# EAGLE board LightRetaggioSchema (EAGLE 9.6.2)
DATECODE: 20200423
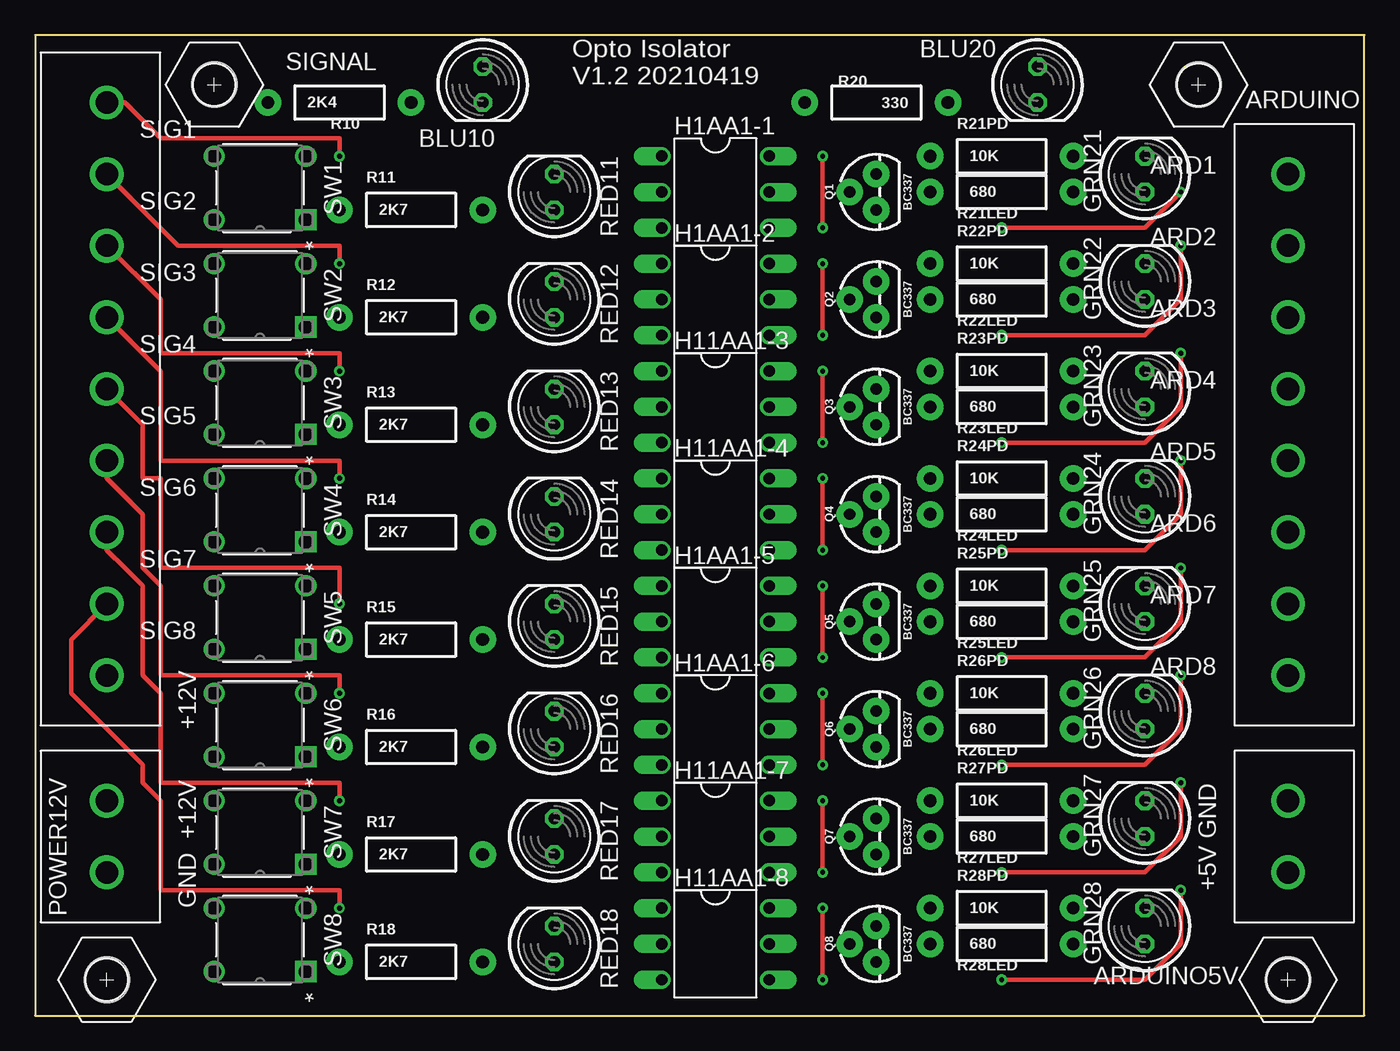
[diagram p0: board, top side]
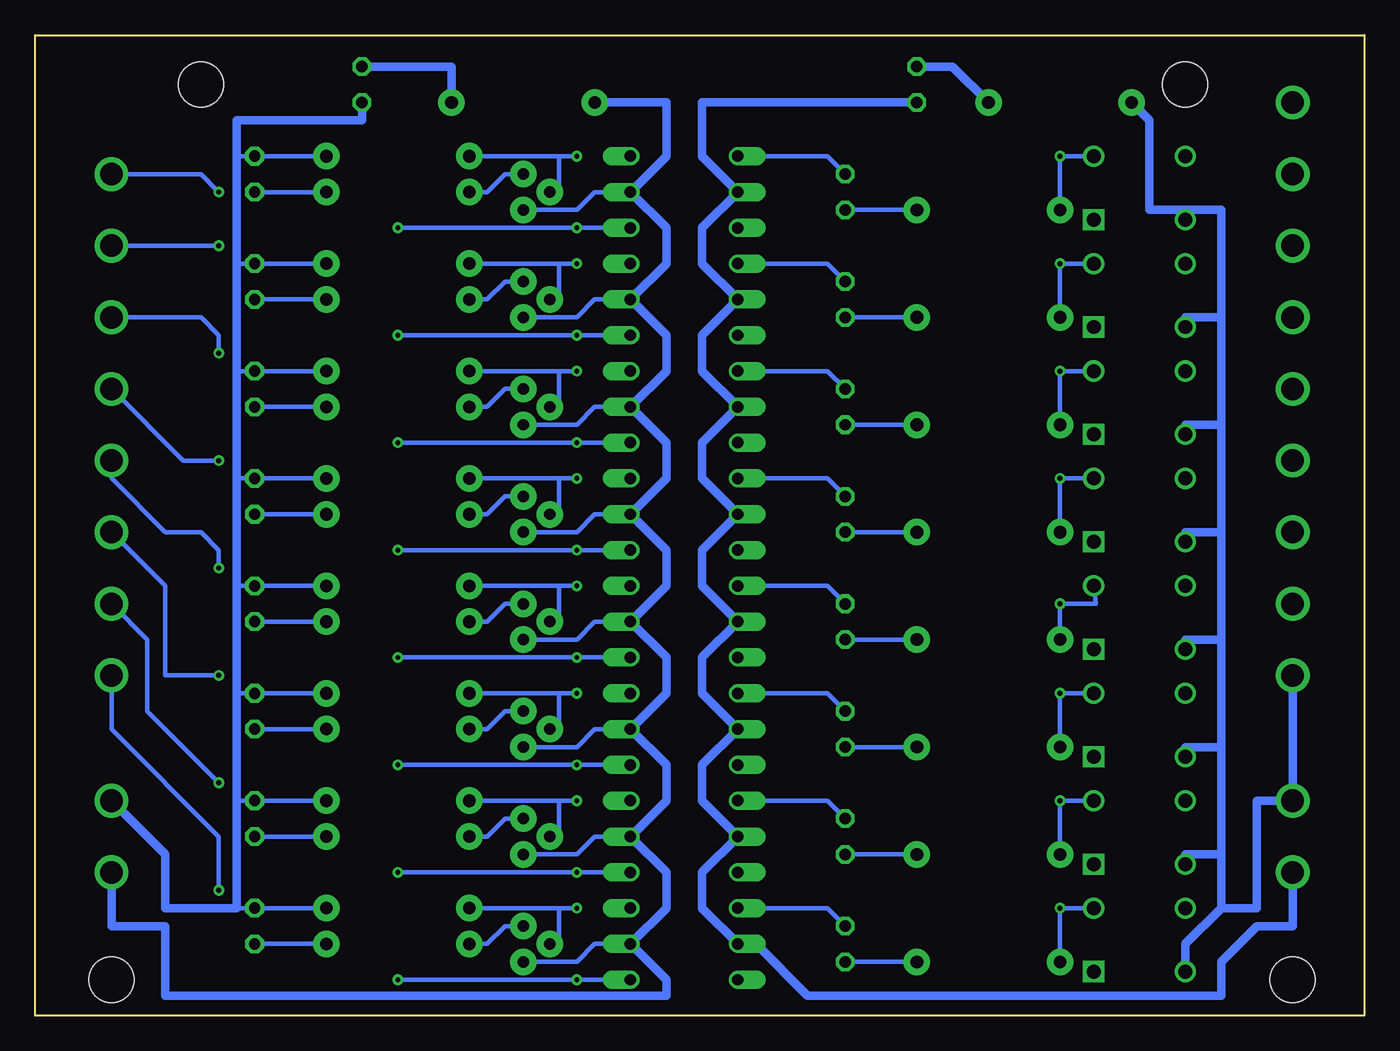
[diagram p1: board, bottom side, seen from below]

Size 94.31 x 69.54 mm. Coordinates in mm from the lower left corner, seen from the top.
Outline: 0,0 94.31,0 94.31,69.54 0,69.54 0,0
Copper layers (1*16): Top 0.035mm / dielectric 1.5mm / Bottom 0.035mm
Design rules "default": minimum track width 6mil, minimum drill 0.35mm, track to track 6mil, track to pad 6mil, pad to pad 6mil, via to via 6mil, smd to smd 6mil, copper to edge 40mil, drill to drill 6mil, minimum pad ring 10mil, minimum via ring 8mil, stop-mask expansion 4mil, vias tented up to drill 0mil, thermal gap 10mil
Net classes: 0 default: width 0.305 mm, clearance 0.152 mm; 1 ground: width 0.61 mm, clearance 0.305 mm; 2 power: width 0.61 mm, clearance 0.305 mm
Holes 3.2 mm at 12.7,66.04 5.08,2.54 88.9,2.54 82.55,66.04

## Footprints (pad centres in the part's own frame; a part is rotated, then mirrored left to right if it is on the bottom)
691311500108 = drill 1.6: 1 -17.78,0; 2 -12.7,0; 3 -7.62,0; 4 -2.54,0; 5 2.54,0; 6 7.62,0; 7 12.7,0; 8 17.78,0
691311500102 = drill 1.6: 1 -2.54,0; 2 2.54,0
LED5MM = drill 0.813 octagon: A -1.27,0; K 1.27,0
DIL06 = drill 0.813 offset: 1 -2.54,-3.81; 2 0,-3.81; 3 2.54,-3.81; 4 2.54,3.81; 5 0,3.81; 6 -2.54,3.81
TO-92 = drill 0.813 pad 1.88: 1 -1.27,0; 2 0,1.905; 3 1.27,0
AXIAL-0.4 = drill 0.9 pad 1.88: P$1 -5.08,0; P$2 5.08,0
691311500109 = drill 1.6: 1 -20.32,0; 2 -15.24,0; 3 -10.16,0; 4 -5.08,0; 5 0,0; 6 5.08,0; 7 10.16,0; 8 15.24,0; 9 20.32,0
SW4_1825910-D = drill 0.991 pad 1.499 square: 1 -6.502,4.496 | drill 0.991 pad 1.499: 2 0,4.496; 3 -6.502,0; 4 0,0

## Placement (x,y rotation side)
ARDUINO  [691311500108]  88.9,41.91 90 top
ARDUINO5V  [691311500102]  88.9,12.7 90 top
BLU10  [LED5MM]  31.75,66.04 270 top
BLU20  [LED5MM]  71.12,66.04 270 top
GRN21  [LED5MM]  78.74,59.69 90 top
GRN22  [LED5MM]  78.74,52.07 90 top
GRN23  [LED5MM]  78.74,44.45 90 top
GRN24  [LED5MM]  78.74,36.83 90 top
GRN25  [LED5MM]  78.74,29.21 90 top
GRN26  [LED5MM]  78.74,21.59 90 top
GRN27  [LED5MM]  78.74,13.97 90 top
GRN28  [LED5MM]  78.74,6.35 90 top
H1AA1-1  IL250  [DIL06]  48.26,58.42 270 top
H1AA1-2  IL250  [DIL06]  48.26,50.8 270 top
H1AA1-5  IL250  [DIL06]  48.26,27.94 270 top
H1AA1-6  IL250  [DIL06]  48.26,20.32 270 top
H11AA1-3  IL250  [DIL06]  48.26,43.18 270 top
H11AA1-4  IL250  [DIL06]  48.26,35.56 270 top
H11AA1-7  IL250  [DIL06]  48.26,12.7 270 top
H11AA1-8  IL250  [DIL06]  48.26,5.08 270 top
POWER12V  [691311500102]  5.08,12.7 270 top
Q1  BC337  [TO-92]  59.69,58.42 90 top
Q2  BC337  [TO-92]  59.69,50.8 90 top
Q3  BC337  [TO-92]  59.69,43.18 90 top
Q4  BC337  [TO-92]  59.69,35.56 90 top
Q5  BC337  [TO-92]  59.69,27.94 90 top
Q6  BC337  [TO-92]  59.69,20.32 90 top
Q7  BC337  [TO-92]  59.69,12.7 90 top
Q8  BC337  [TO-92]  59.69,5.08 90 top
R10  2K4  [AXIAL-0.4]  21.59,64.77 0 top
R11  2K7  [AXIAL-0.4]  26.67,57.15 0 top
R12  2K7  [AXIAL-0.4]  26.67,49.53 0 top
R13  2K7  [AXIAL-0.4]  26.67,41.91 0 top
R14  2K7  [AXIAL-0.4]  26.67,34.29 0 top
R15  2K7  [AXIAL-0.4]  26.67,26.67 0 top
R16  2K7  [AXIAL-0.4]  26.67,19.05 0 top
R17  2K7  [AXIAL-0.4]  26.67,11.43 0 top
R18  2K7  [AXIAL-0.4]  26.67,3.81 0 top
R20  330  [AXIAL-0.4]  59.69,64.77 180 top
R21LED  680  [AXIAL-0.4]  68.58,58.42 0 top
R21PD  10K  [AXIAL-0.4]  68.58,60.96 0 top
R22LED  680  [AXIAL-0.4]  68.58,50.8 0 top
R22PD  10K  [AXIAL-0.4]  68.58,53.34 0 top
R23LED  680  [AXIAL-0.4]  68.58,43.18 0 top
R23PD  10K  [AXIAL-0.4]  68.58,45.72 0 top
R24LED  680  [AXIAL-0.4]  68.58,35.56 0 top
R24PD  10K  [AXIAL-0.4]  68.58,38.1 0 top
R25LED  680  [AXIAL-0.4]  68.58,27.94 0 top
R25PD  10K  [AXIAL-0.4]  68.58,30.48 0 top
R26LED  680  [AXIAL-0.4]  68.58,20.32 0 top
R26PD  10K  [AXIAL-0.4]  68.58,22.86 0 top
R27LED  680  [AXIAL-0.4]  68.58,12.7 0 top
R27PD  10K  [AXIAL-0.4]  68.58,15.24 0 top
R28LED  680  [AXIAL-0.4]  68.58,5.08 0 top
R28PD  10K  [AXIAL-0.4]  68.58,7.62 0 top
RED11  [LED5MM]  36.83,58.42 90 top
RED12  [LED5MM]  36.83,50.8 90 top
RED13  [LED5MM]  36.83,43.18 90 top
RED14  [LED5MM]  36.83,35.56 90 top
RED15  [LED5MM]  36.83,27.94 90 top
RED16  [LED5MM]  36.83,20.32 90 top
RED17  [LED5MM]  36.83,12.7 90 top
RED18  [LED5MM]  36.83,5.08 90 top
SIGNAL  [691311500109]  5.08,44.45 270 top
SW1  1-1825910-4  [SW4_1825910-D]  12.7,60.96 180 top
SW2  1-1825910-4  [SW4_1825910-D]  12.7,53.34 180 top
SW3  1-1825910-4  [SW4_1825910-D]  12.7,45.72 180 top
SW4  1-1825910-4  [SW4_1825910-D]  12.7,38.1 180 top
SW5  1-1825910-4  [SW4_1825910-D]  12.7,30.48 180 top
SW6  1-1825910-4  [SW4_1825910-D]  12.7,22.86 180 top
SW7  1-1825910-4  [SW4_1825910-D]  12.7,15.24 180 top
SW8  1-1825910-4  [SW4_1825910-D]  12.7,7.62 180 top
U$1  [M3.0_SW6.0]  82.55,66.04 0 top
U$2  [M3.0_SW6.0]  5.08,2.54 0 top
U$3  [M3.0_SW6.0]  12.7,66.04 0 top
U$5  [M3.0_SW6.0]  88.9,2.54 0 top

## Library data of the parts
ARDUINO SIGNAL = Wurth_Elektronik_Electromechanic_Terminal_Blocks_Connectors_rev19d; OC_FARNELL: unknown
ARDUINO5V POWER12V = Wurth_Elektronik_Electromechanic_Terminal_Blocks_Connectors_rev19d; MF: WURTH ELEKTRONIK; MPN: 691311500102; OC_FARNELL: 1641978
BLU10 BLU20 GRN21-GRN28 RED11-RED18 = led; MF: ALCOSWITCH - TE CONNECTIVITY; MPN: FSM8JH; OC_FARNELL: 1555985
H1AA1-1 H1AA1-2 H1AA1-5 H1AA1-6 H11AA1-3 H11AA1-4 H11AA1-7 H11AA1-8 = optocoupler; MF: VISHAY/TELEFUNKEN; MPN: IL250; OC_FARNELL: unknown; OC_NEWARK: 58K1705
Q1-Q8 = SparkFun-DiscreteSemi; OC_FARNELL: unknown; PROD_ID: TRANS-09536
R10-R18 R20 R21LED R21PD R22LED R22PD R23LED R23PD R24LED R24PD R25LED R25PD R26LED R26PD R27LED R27PD R28LED R28PD = SparkFun-Passives; OC_FARNELL: unknown
SW1-SW8 = Switches; BUILT_BY: EMA_UL_Team; CATEGORY: Tactile Switches; CONFIGURATION__POLE-THROW_: Single Pole - Single Throw; COPYRIGHT: Copyright (C) 2016 Accelerated Designs. All rights reserved; DESCRIPTION: FSM8JH=6MM TACT SWITCH, HIGH TEMP; MANUFACTURER_PART_NUMBER: 1-1825910-4; MAX_SWITCHING_CURRENT: -; MAX_SWITCHING_VOLTAGE_AC_: -; OC_FARNELL: unknown; PART_STATUS: active; PRODUCT_TYPE: Switch; SERIES: Unknown; SWITCH_TYPE: Tactile Switches; TE_PART_NUMBER: 1-1825910-4; VENDOR: TE Connectivity
U$1-U$3 U$5 = mechanics_v4

## Nets
+5VARD: ARDUINO5V.1 H1AA1-1.5 H1AA1-2.5 H1AA1-5.5 H1AA1-6.5 H11AA1-3.5 H11AA1-4.5 H11AA1-7.5 H11AA1-8.5 Q1.1 Q2.1 Q3.1 Q4.1 Q5.1 Q6.1 Q7.1 Q8.1 R20.P$2
DIG1: ARDUINO.8 H1AA1-1.4 Q1.2 R21PD.P$1
DIG2: ARDUINO.7 H1AA1-2.4 Q2.2 R22PD.P$1
DIG3: ARDUINO.6 H11AA1-3.4 Q3.2 R23PD.P$1
DIG4: ARDUINO.5 H11AA1-4.4 Q4.2 R24PD.P$1
DIG5: ARDUINO.4 H1AA1-5.4 Q5.2 R25PD.P$1
DIG6: ARDUINO.3 H1AA1-6.4 Q6.2 R26PD.P$1
DIG7: ARDUINO.2 H11AA1-7.4 Q7.2 R27PD.P$1
DIG8: ARDUINO.1 H11AA1-8.4 Q8.2 R28PD.P$1
GND_ARD: ARDUINO5V.2 BLU20.K GRN21.K GRN22.K GRN23.K GRN24.K GRN25.K GRN26.K GRN27.K GRN28.K R21PD.P$2 R22PD.P$2 R23PD.P$2 R24PD.P$2 R25PD.P$2 R26PD.P$2 R27PD.P$2 R28PD.P$2
GND_SIG [ground]: BLU10.K H1AA1-1.2 H1AA1-2.2 H1AA1-5.2 H1AA1-6.2 H11AA1-3.2 H11AA1-4.2 H11AA1-7.2 H11AA1-8.2 POWER12V.2
N$1: BLU10.A R10.P$2
N$2: BLU20.A R20.P$1
N$3: H11AA1-8.1 RED18.K
N$4: H11AA1-7.1 RED17.K
N$5: H1AA1-6.1 RED16.K
N$6: H1AA1-5.1 RED15.K
N$7: Q1.3 R21LED.P$1
N$8: GRN21.A R21LED.P$2
N$9: H11AA1-4.1 RED14.K
N$10: Q2.3 R22LED.P$1
N$11: GRN22.A R22LED.P$2
N$12: Q3.3 R23LED.P$1
N$13: GRN23.A R23LED.P$2
N$14: Q4.3 R24LED.P$1
N$15: GRN24.A R24LED.P$2
N$16: R13.P$2 RED13.A
N$17: H11AA1-3.1 RED13.K
N$18: R14.P$2 RED14.A
N$19: R12.P$2 RED12.A
N$20: R11.P$2 RED11.A
N$21: R17.P$2 RED17.A
N$22: R18.P$2 RED18.A
N$23: R16.P$2 RED16.A
N$24: R15.P$2 RED15.A
N$25: Q5.3 R25LED.P$1
N$26: GRN25.A R25LED.P$2
N$27: Q6.3 R26LED.P$1
N$28: GRN26.A R26LED.P$2
N$29: Q7.3 R27LED.P$1
N$30: GRN27.A R27LED.P$2
N$31: Q8.3 R28LED.P$1
N$32: GRN28.A R28LED.P$2
N$33: H1AA1-2.1 RED12.K
N$34: H1AA1-1.1 RED11.K
RET+12_SIG1: R11.P$1 SIGNAL.1 SW1.3
RET+12_SIG2: R12.P$1 SIGNAL.2 SW2.3
RET+12_SIG3: R13.P$1 SIGNAL.3 SW3.3
RET+12_SIG4: R14.P$1 SIGNAL.4 SW4.3
RET+12_SIG5: R15.P$1 SIGNAL.5 SW5.3
RET+12_SIG6: R16.P$1 SIGNAL.6 SW6.3
RET+12_SIG7: R17.P$1 SIGNAL.7 SW7.3
RET+12_SIG8: R18.P$1 SIGNAL.8 SW8.3
VCC+12_SIGBYPASS [power]: POWER12V.1 R10.P$1 SIGNAL.9 SW1.2 SW2.2 SW3.2 SW4.2 SW5.2 SW6.2 SW7.2 SW8.2

## Tracks (layer width: path | path; a pad name or v marks a point on that pad's centre or on a via)
+5VARD
  Bottom 0.305: Q1.1 55.88,57.15 54.61,58.42 H1AA1-1.5 | H1AA1-2.5 54.61,50.8 55.88,49.53 Q2.1 | H11AA1-3.5 54.61,43.18 55.88,41.91 Q3.1 | H11AA1-4.5 54.61,35.56 55.88,34.29 Q4.1 | H1AA1-5.5 54.61,27.94 55.88,26.67 Q5.1 | H1AA1-6.5 54.61,20.32 55.88,19.05 Q6.1 | H11AA1-7.5 54.61,12.7 55.88,11.43 Q7.1 | H11AA1-8.5 54.61,5.08 55.88,3.81 Q8.1
  Bottom 0.61: R20.P$2 49.53,64.77 49.53,60.96 H1AA1-1.5 49.53,55.88 49.53,53.34 H1AA1-2.5 49.53,48.26 49.53,45.72 H11AA1-3.5 49.53,40.64 49.53,38.1 H11AA1-4.5 49.53,33.02 49.53,30.48 H1AA1-5.5 49.53,25.4 49.53,22.86 H1AA1-6.5 49.53,17.78 49.53,15.24 H11AA1-7.5 49.53,10.16 49.53,7.62 H11AA1-8.5 49.53,2.54 49.53,1.4 85.09,1.4 85.09,6.35 88.9,6.35 ARDUINO5V.1
DIG1  (via drill 0.35)
  Top 0.305: v55.88,60.96 v55.88,55.88 | v68.58,55.88 74.93,55.88 78.74,55.88 v81.28,58.42
  Bottom 0.305: v55.88,60.96 57.15,60.96 | 57.15,60.96 R21PD.P$1 | H1AA1-1.4 v55.88,55.88 v68.58,55.88 | Q1.2 57.15,58.42 57.15,60.96 | ARDUINO.8 82.55,59.69 v81.28,58.42
DIG2  (via drill 0.35)
  Top 0.305: v55.88,48.26 v55.88,53.34 | v68.58,48.26 74.93,48.26 78.74,48.26 81.28,50.8 v81.28,54.61
  Bottom 0.305: H1AA1-2.4 v55.88,48.26 v68.58,48.26 | v55.88,53.34 57.15,53.34 | 57.15,53.34 R22PD.P$1 | Q2.2 57.15,50.8 57.15,53.34 | ARDUINO.7 v81.28,54.61
DIG3  (via drill 0.35)
  Top 0.305: v68.58,40.64 76.2,40.64 78.74,40.64 81.28,43.18 v81.28,46.99 | v55.88,40.64 v55.88,45.72
  Bottom 0.305: H11AA1-3.4 v55.88,40.64 v68.58,40.64 | Q3.2 57.15,43.18 57.15,45.72 | 57.15,45.72 R23PD.P$1 | v55.88,45.72 57.15,45.72 | v81.28,46.99 81.28,48.26 82.55,49.53 ARDUINO.6
DIG4  (via drill 0.35)
  Top 0.305: v55.88,33.02 v55.88,38.1 | v68.58,33.02 76.2,33.02 78.74,33.02 81.28,35.56 v81.28,39.37
  Bottom 0.305: H11AA1-4.4 v55.88,33.02 v68.58,33.02 | v55.88,38.1 57.15,38.1 | 57.15,38.1 R24PD.P$1 | Q4.2 57.15,35.56 57.15,38.1 | ARDUINO.5 83.82,39.37 v81.28,39.37
DIG5  (via drill 0.35)
  Top 0.305: v55.88,25.4 v55.88,30.48 | v68.58,25.4 74.93,25.4 78.74,25.4 81.28,27.94 v81.28,31.75
  Bottom 0.305: H1AA1-5.4 v55.88,25.4 v68.58,25.4 | v55.88,30.48 57.15,30.48 | 57.15,30.48 R25PD.P$1 | Q5.2 57.15,27.94 57.15,30.48 | ARDUINO.4 88.9,38.1 85.09,34.29 82.55,34.29 81.28,33.02 v81.28,31.75
DIG6  (via drill 0.35)
  Top 0.305: v55.88,17.78 v55.88,22.86 | v68.58,17.78 76.2,17.78 78.74,17.78 81.28,20.32 v81.28,24.13
  Bottom 0.305: H1AA1-6.4 v55.88,17.78 v68.58,17.78 | Q6.2 57.15,20.32 57.15,22.86 | 57.15,22.86 R26PD.P$1 | v55.88,22.86 57.15,22.86 | ARDUINO.3 85.09,30.48 85.09,24.13 v81.28,24.13
DIG7  (via drill 0.35)
  Top 0.305: v55.88,10.16 v55.88,15.24 | v81.28,16.51 81.28,12.7 78.74,10.16 v68.58,10.16
  Bottom 0.305: H11AA1-7.4 v55.88,10.16 v68.58,10.16 | Q7.2 57.15,12.7 57.15,15.24 | 57.15,15.24 R27PD.P$1 | v55.88,15.24 57.15,15.24 | v81.28,16.51 86.36,21.59 86.36,26.67 ARDUINO.2
DIG8  (via drill 0.35)
  Top 0.305: v55.88,2.54 v55.88,7.62 | v68.58,2.54 78.74,2.54 81.28,5.08 v81.28,8.89
  Bottom 0.305: H11AA1-8.4 v55.88,2.54 v68.58,2.54 | Q8.2 57.15,5.08 57.15,7.62 | 57.15,7.62 R28PD.P$1 | v55.88,7.62 57.15,7.62 | ARDUINO.1 88.9,20.32 81.28,12.7 v81.28,8.89
GND_ARD
  Bottom 0.305: R21PD.P$2 GRN21.K 80.01,60.96 | R22PD.P$2 GRN22.K 80.01,53.34 | R23PD.P$2 GRN23.K 80.01,45.72 | R24PD.P$2 GRN24.K 80.01,38.1 | R25PD.P$2 GRN25.K 80.01,30.48 | R26PD.P$2 GRN26.K 80.01,22.86 | R27PD.P$2 GRN27.K 80.01,15.24 | R28PD.P$2 GRN28.K 80.01,7.62
  Bottom 0.61: ARDUINO5V.2 85.09,11.43 85.09,7.62 80.01,7.62 80.01,15.24 80.01,22.86 80.01,30.48 80.01,38.1 80.01,45.72 80.01,53.34 80.01,60.96 80.01,63.5 71.12,63.5 BLU20.K
GND_SIG
  Bottom 0.61: BLU10.K 46.99,64.77 46.99,60.96 H1AA1-1.2 46.99,55.88 46.99,53.34 H1AA1-2.2 46.99,48.26 46.99,45.72 H11AA1-3.2 46.99,40.64 46.99,38.1 H11AA1-4.2 46.99,33.02 46.99,30.48 H1AA1-5.2 46.99,25.4 46.99,22.86 H1AA1-6.2 46.99,17.78 46.99,15.24 H11AA1-7.2 46.99,10.16 46.99,7.62 H11AA1-8.2 43.18,5.08 39.5,1.4 10.16,1.4 10.16,3.81 7.62,6.35 5.08,6.35 POWER12V.2
N$1
  Bottom 0.61: R10.P$2 29.21,67.31 BLU10.A
N$2
  Bottom 0.61: R20.P$1 64.77,67.31 BLU20.A
N$3
  Bottom 0.305: RED18.K 38.1,7.62 H11AA1-8.1
N$4
  Bottom 0.305: RED17.K 38.1,15.24 H11AA1-7.1
N$5
  Bottom 0.305: RED16.K 38.1,22.86 H1AA1-6.1
N$6
  Bottom 0.305: RED15.K 38.1,30.48 H1AA1-5.1
N$7
  Bottom 0.305: R21LED.P$1 62.23,58.42 60.96,59.69 Q1.3
N$8
  Bottom 0.305: GRN21.A R21LED.P$2
N$9
  Bottom 0.305: RED14.K 38.1,38.1 H11AA1-4.1
N$10
  Bottom 0.305: R22LED.P$1 62.23,50.8 60.96,52.07 Q2.3
N$11
  Bottom 0.305: R22LED.P$2 GRN22.A
N$12
  Bottom 0.305: Q3.3 60.96,44.45 62.23,43.18 R23LED.P$1
N$13
  Bottom 0.305: GRN23.A R23LED.P$2
N$14
  Bottom 0.305: Q4.3 60.96,36.83 62.23,35.56 R24LED.P$1
N$15
  Bottom 0.305: GRN24.A R24LED.P$2
N$16
  Bottom 0.305: R13.P$2 RED13.A
N$17
  Bottom 0.305: RED13.K 38.1,45.72 H11AA1-3.1
N$18
  Bottom 0.305: R14.P$2 RED14.A
N$19
  Bottom 0.305: R12.P$2 RED12.A
N$20
  Bottom 0.305: R11.P$2 RED11.A
N$21
  Bottom 0.305: R17.P$2 RED17.A
N$22
  Bottom 0.305: R18.P$2 RED18.A
N$23
  Bottom 0.305: R16.P$2 RED16.A
N$24
  Bottom 0.305: R15.P$2 RED15.A
N$25
  Bottom 0.305: Q5.3 60.96,29.21 62.23,27.94 R25LED.P$1
N$26
  Bottom 0.305: GRN25.A R25LED.P$2
N$27
  Bottom 0.305: Q6.3 60.96,21.59 62.23,20.32 R26LED.P$1
N$28
  Bottom 0.305: GRN26.A R26LED.P$2
N$29
  Bottom 0.305: Q7.3 60.96,13.97 62.23,12.7 R27LED.P$1
N$30
  Bottom 0.305: GRN27.A R27LED.P$2
N$31
  Bottom 0.305: Q8.3 60.96,6.35 62.23,5.08 R28LED.P$1
N$32
  Bottom 0.305: GRN28.A R28LED.P$2
N$33
  Bottom 0.305: RED12.K 38.1,53.34 H1AA1-2.1
N$34
  Bottom 0.305: RED11.K 38.1,60.96 H1AA1-1.1
RET+12_SIG1  (via drill 0.35)
  Top 0.305: v21.59,60.96 21.59,62.23 8.89,62.23 6.35,64.77 SIGNAL.1
  Bottom 0.305: R11.P$1 v21.59,60.96 SW1.3
RET+12_SIG2  (via drill 0.35)
  Top 0.305: v21.59,53.34 21.59,54.61 10.16,54.61 SIGNAL.2
  Bottom 0.305: R12.P$1 v21.59,53.34 SW2.3
RET+12_SIG3  (via drill 0.35)
  Top 0.305: v21.59,45.72 21.59,46.99 8.89,46.99 8.89,50.8 SIGNAL.3
  Bottom 0.305: R13.P$1 v21.59,45.72 SW3.3
RET+12_SIG4  (via drill 0.35)
  Top 0.305: v21.59,38.1 21.59,39.37 8.89,39.37 8.89,45.72 SIGNAL.4
  Bottom 0.305: R14.P$1 v21.59,38.1 SW4.3
RET+12_SIG5  (via drill 0.35)
  Top 0.305: v21.59,29.21 21.59,31.75 8.89,31.75 8.89,38.1 7.62,38.1 7.62,41.91 SIGNAL.5
  Bottom 0.305: R15.P$1 v21.59,29.21 19.05,29.21 SW5.3
RET+12_SIG6  (via drill 0.35)
  Top 0.305: v21.59,22.86 21.59,24.13 8.89,24.13 8.89,30.48 7.62,31.75 7.62,35.56 5.08,38.1 SIGNAL.6
  Bottom 0.305: R16.P$1 v21.59,22.86 SW6.3
RET+12_SIG7  (via drill 0.35)
  Top 0.305: v21.59,15.24 21.59,16.51 8.89,16.51 8.89,22.86 7.62,24.13 7.62,30.48 6.35,31.75 5.08,33.02 SIGNAL.7
  Bottom 0.305: R17.P$1 v21.59,15.24 SW7.3
RET+12_SIG8  (via drill 0.35)
  Top 0.305: v21.59,7.62 21.59,8.89 8.89,8.89 8.89,15.24 7.62,16.51 7.62,17.78 2.54,22.86 2.54,26.67 SIGNAL.8
  Bottom 0.305: R18.P$1 v21.59,7.62 SW8.3
VCC+12_SIGBYPASS
  Bottom 0.61: 10.16,41.91 10.16,34.29 | 10.16,34.29 10.16,26.67 | 10.16,26.67 10.16,19.05 | SW5.2 12.7,26.67 10.16,26.67 | SW3.2 12.7,41.91 10.16,41.91 | SW1.2 12.7,57.15 | 12.7,57.15 10.16,57.15 10.16,49.53 | 10.16,49.53 10.16,41.91 | SW2.2 12.7,49.53 10.16,49.53 | SW4.2 12.7,34.29 10.16,34.29 | SW6.2 12.7,19.05 10.16,19.05 | SIGNAL.9 POWER12V.1 7.62,15.24 7.62,7.62 10.16,7.62 | 10.16,19.05 10.16,11.43 | 10.16,11.43 10.16,7.62 | R10.P$1 15.24,63.5 15.24,57.15 12.7,57.15 | 10.16,7.62 12.7,5.08 SW8.2 | 10.16,11.43 12.7,11.43 SW7.2

## Text on the board
tPlace: Opto Isolator / V1.2 20210419
tNames: SIG1 | ARD1 | SIG2 | ARD2 | SIG3 | ARD3 | SIG4 | ARD4 | SIG5 | ARD5 | SIG6 | ARD6 | SIG7 | ARD7 | SIG8 | ARD8 | +12V | +5V GND | GND +12V